# EAGLE board vader3 (EAGLE 7.4.0)
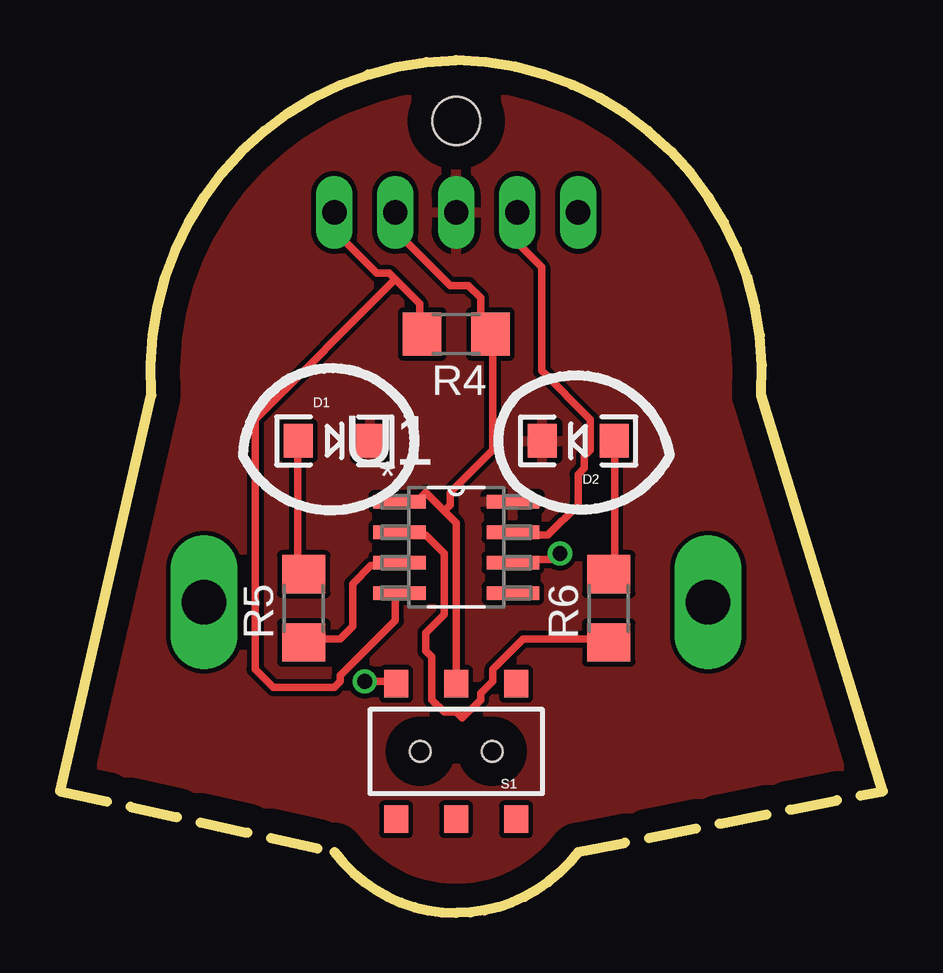
[diagram p0: board, top side]
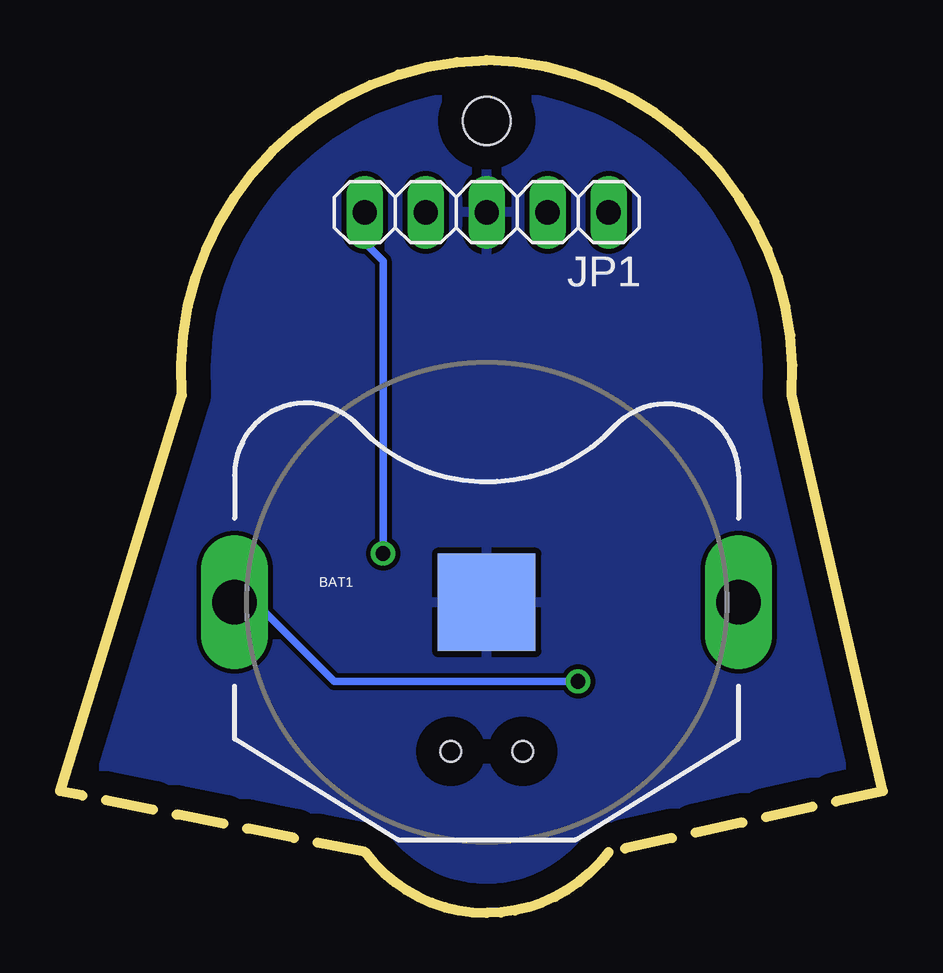
[diagram p1: board, bottom side, seen from below]

Size 34.29 x 35.56 mm. Coordinates in mm from the lower left corner, seen from the top.
Outline: 0,5.08 11.43,2.54 arc53 16.51,0 arc53 21.59,2.54 34.29,5.08 29.21,21.59 arc93 16.51,35.56 arc93 3.81,21.59 0,5.08
Copper layers (1*16): Top 0.035mm / dielectric 1.5mm / Bottom 0.035mm
Design rules "default *": minimum track width 12mil, minimum drill 24mil, track to track 8mil, track to pad 8mil, pad to pad 8mil, via to via 8mil, smd to smd 8mil, copper to edge 40mil, drill to drill 8mil, minimum pad ring 10mil, minimum via ring 8mil, stop-mask expansion 4mil, vias tented up to drill 0mil, thermal gap 10mil
Holes 2 mm at 16.51,33.02

## Footprints (pad centres in the part's own frame; a part is rotated, then mirrored left to right if it is on the bottom)
BATTERY_20MM_PTH_COMPACT = drill 1.854 long: 1 -10.5,0; 3 10.5,0 | smd 4.064 x 4.064: 2 0,0
LED-1206 = smd 1.2 x 1.4: A -1.5,0; C 1.5,0
1X05 = drill 1.016 long: 1 -5.08,0; 2 -2.54,0; 3 0,0; 4 2.54,0; 5 5.08,0
R1206 = smd 1.6 x 1.803: 1 -1.422,0; 2 1.422,0
AYZ0202 = smd 1 x 1.15: 1 -2.5,2.825; 2 0,2.825; 3 2.5,2.825; 4 -2.5,-2.825; 5 0,-2.825; 6 2.5,-2.825 | hole 0.85: 1.5,0; -1.5,0
SOIC127P600X175-8N = smd 2.184 x 0.559: 1 -2.362,1.905; 2 -2.362,0.635; 3 -2.362,-0.635; 4 -2.362,-1.905; 5 2.362,-1.905; 6 2.362,-0.635; 7 2.362,0.635; 8 2.362,1.905

## Placement (x,y rotation side)
BAT1  [BATTERY_20MM_PTH_COMPACT]  16.51,12.95 0 bottom
D1  [LED-1206]  11.43,19.69 0 top
D2  [LED-1206]  21.59,19.69 180 top
JP1  [1X05]  16.51,29.21 180 bottom
R4  [R1206]  16.51,24.13 180 top
R5  [R1206]  10.16,12.7 90 top
R6  [R1206]  22.86,12.7 90 top
S1  AYZ0202  [AYZ0202]  16.51,6.73 180 top
U1  PIC12F1822-I/SN  [SOIC127P600X175-8N]  16.51,15.24 0 top

## Library data of the parts
BAT1 = SparkFun-Electromechanical
D1 D2 = SparkFun-LED
JP1 = pinhead
R4-R6 = resistor
S1 = SparkFun-Electromechanical; PROD_ID: SWCH-08179
U1 = PIC12F1822ISN; MPN: PIC12F1822-I/SN; OC_FARNELL: 1971857; OC_NEWARK: 53R0197; PACKAGE: SOIC-8; SUPPLIER: Microchip

## Nets
GND: BAT1.2 D1.C D2.C JP1.3 U1.8
ICSPCLK: JP1.5 U1.6
ICSPDAT: JP1.4 U1.7
N$1: BAT1.1 S1.6
N$4: R6.1 U1.2
N$5: R5.1 U1.3
N$6: D2.A R6.2
N$7: D1.A R5.2
VDD: JP1.2 R4.1 S1.5 U1.1
VPP: JP1.1 R4.2 U1.4

## Tracks (layer width: path | path; a pad name or v marks a point on that pad's centre or on a via)
GND
  pour Top: -1.27,0 35.56,0 35.56,35.56 -1.27,35.56
  pour Bottom: 35.56,0 -1.27,0 -1.27,35.56 35.56,35.56
ICSPCLK  (via drill 0.61)
  Top 0.305: v20.83,14.99 20.57,14.73 19.05,14.73 U1.6
  Bottom 0.305: v20.83,14.99 20.83,27.18 21.59,27.94 JP1.5
ICSPDAT
  Top 0.305: JP1.4 19.05,27.94 20.07,26.92 20.07,22.61 22.1,20.57 22.1,19.3 21.84,19.05 21.84,18.54 21.59,18.29 21.59,17.02 20.32,15.75 19.05,15.75 U1.7
N$1  (via drill 0.61)
  Top 0.305: v12.7,9.65 13.97,9.65 S1.6
  Bottom 0.305: v12.7,9.65 22.86,9.65 26.16,12.95 BAT1.1
N$4
  Top 0.305: R6.1 22.86,11.43 19.3,11.43 18.03,10.16 18.03,9.65 17.53,9.14 17.53,8.89 16.76,8.13 16.51,8.38 16,8.38 15.49,8.89 15.49,10.67 15.24,10.92 15.24,11.68 16,12.45 16,14.99 15.24,15.75 14.22,15.75 U1.2
N$5
  Top 0.305: R5.1 10.16,11.43 11.68,11.43 12.19,11.94 12.19,13.72 12.95,14.48 13.97,14.48 U1.3
N$6
  Top 0.305: D2.A 23.11,19.56 23.11,14.48 22.86,14.22 R6.2
N$7
  Top 0.305: D1.A 9.91,19.56 9.91,14.48 10.16,14.22 R5.2
VDD
  Top 0.305: S1.5 16.51,16.26 16,16.76 | 16,16.76 15.24,17.53 14.73,17.02 14.22,17.02 U1.1 | 16,16.76 16.26,17.02 16.26,17.53 18.03,19.3 18.03,24.13 R4.1 17.78,24.13 17.53,24.38 17.53,25.65 17.02,26.16 16.26,26.16 13.97,28.45 JP1.2
VPP
  Top 0.305: 13.97,26.42 13.72,26.67 13.21,26.67 11.43,28.45 JP1.1 | 13.97,26.42 14.99,25.4 14.99,24.13 R4.2 | 13.97,26.42 8.13,20.57 8.13,10.16 8.89,9.4 11.43,9.4 11.68,9.65 11.68,9.91 13.97,12.19 13.97,13.21 U1.4

## Text on the board
_tNames: R4 | D1 | U1 | D2 | R5 | R6 | S1
_bNames: JP1 | BAT1